# Altium PCB PCB.PcbDoc (part 1 of 2)
Units mm, origin at the board's own origin, x right, y up, seen from the top; angles counter-clockwise.
Board outline 100 x 50 mm, 4 copper layers (Top Layer, Vdd, GND, Bottom Layer), stack 0.603 mm thick; 115 components, 77 nets, 418 pads, 251 vias.
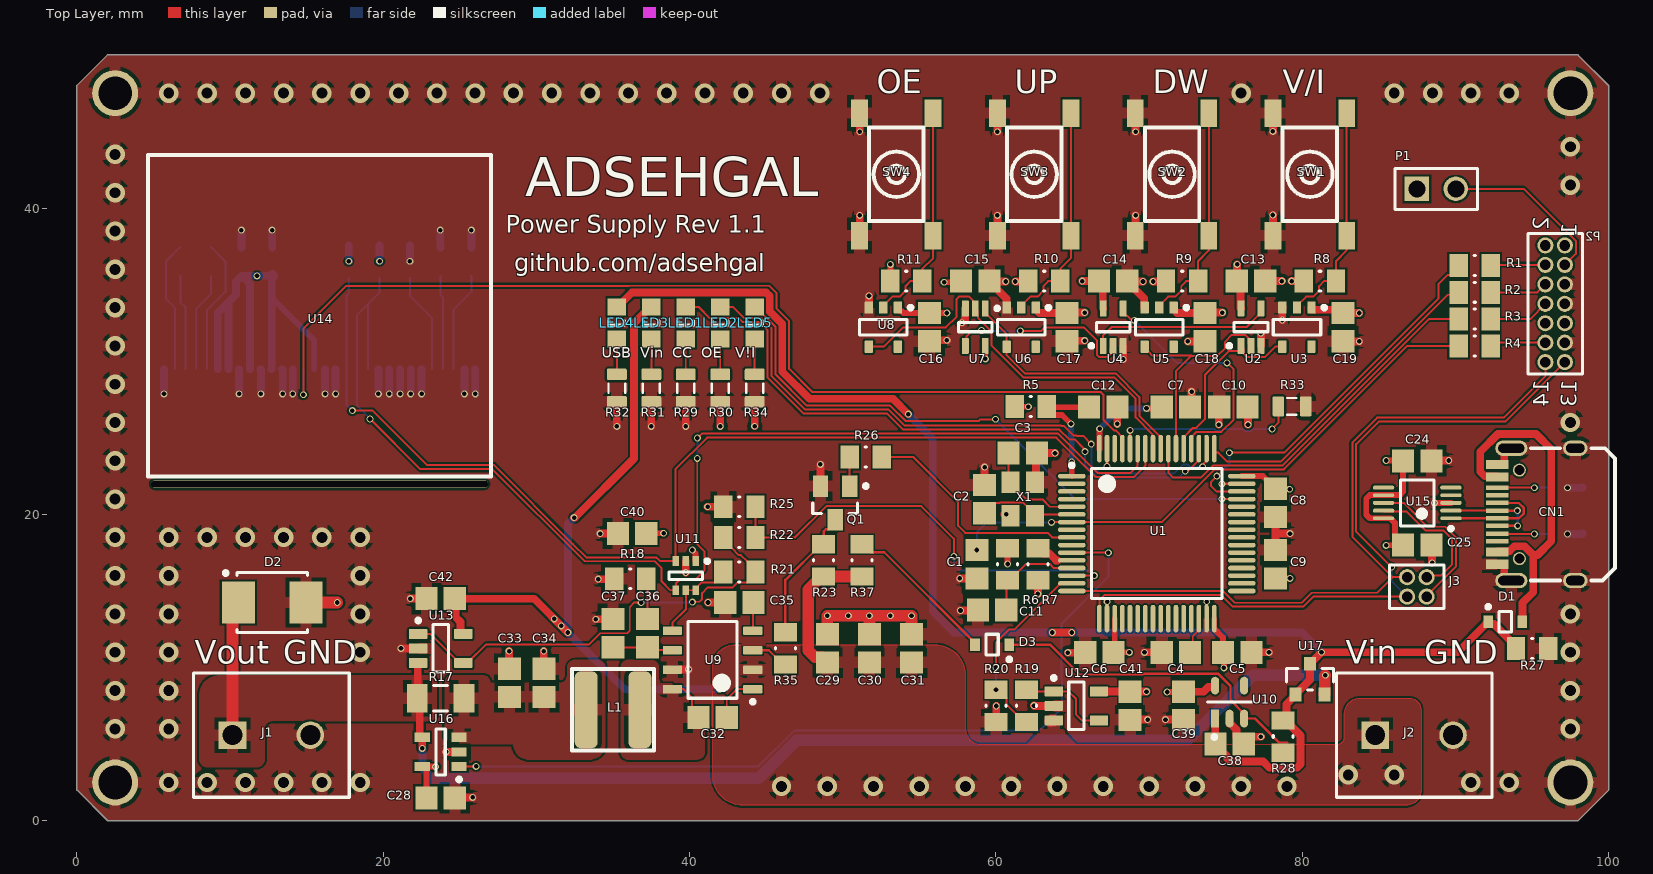
[diagram p0: Top Layer view]
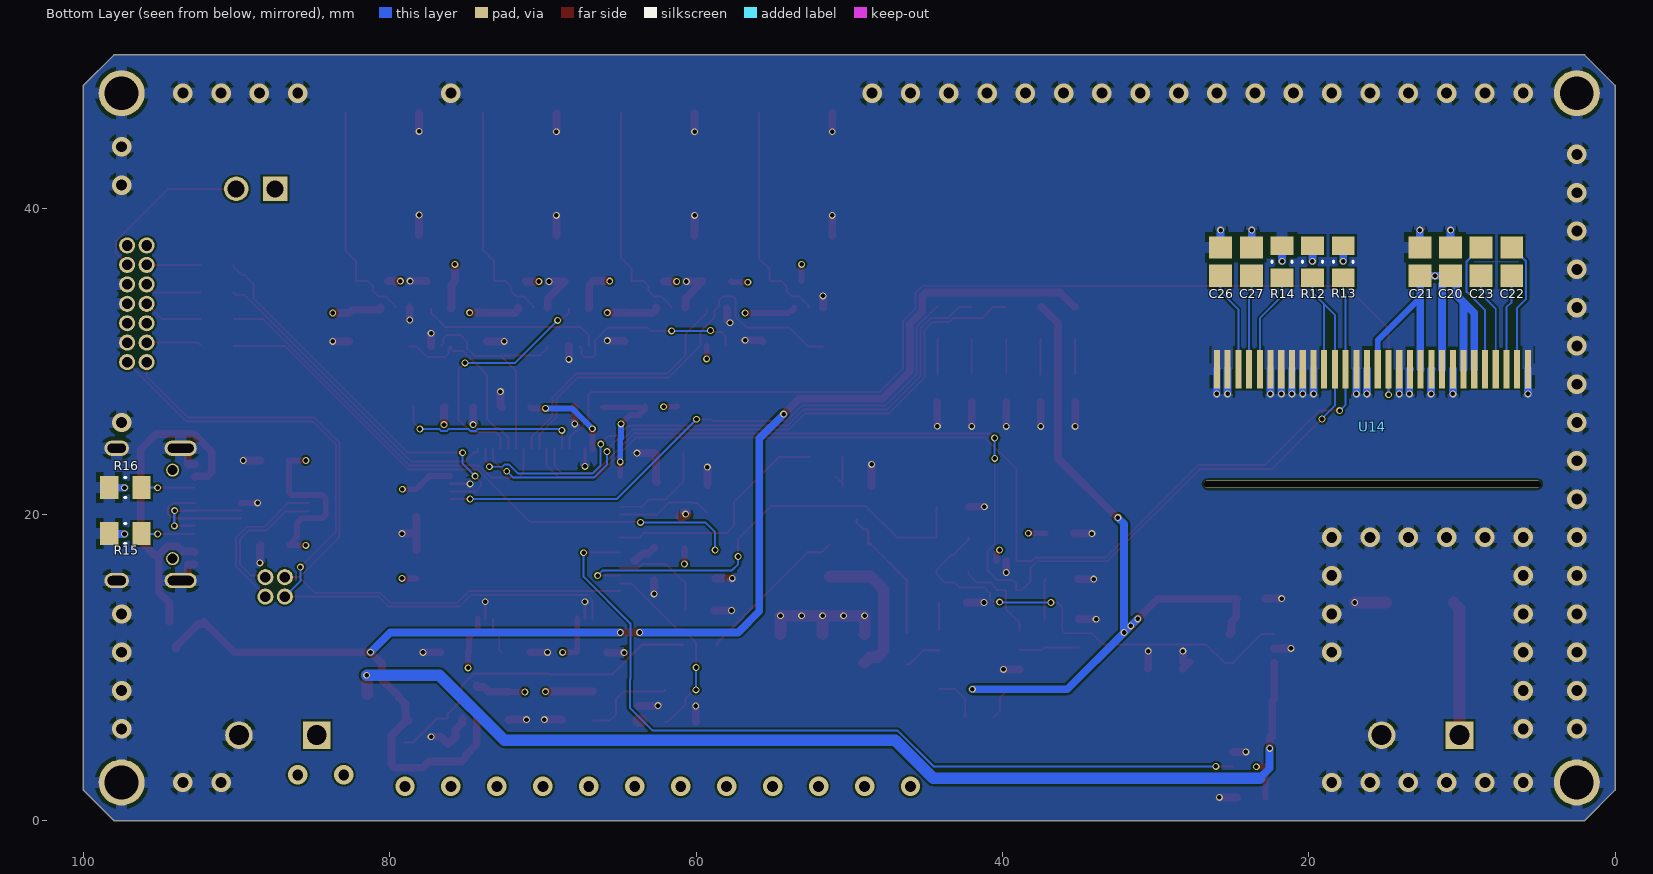
[diagram p1: Bottom Layer view, seen from below]
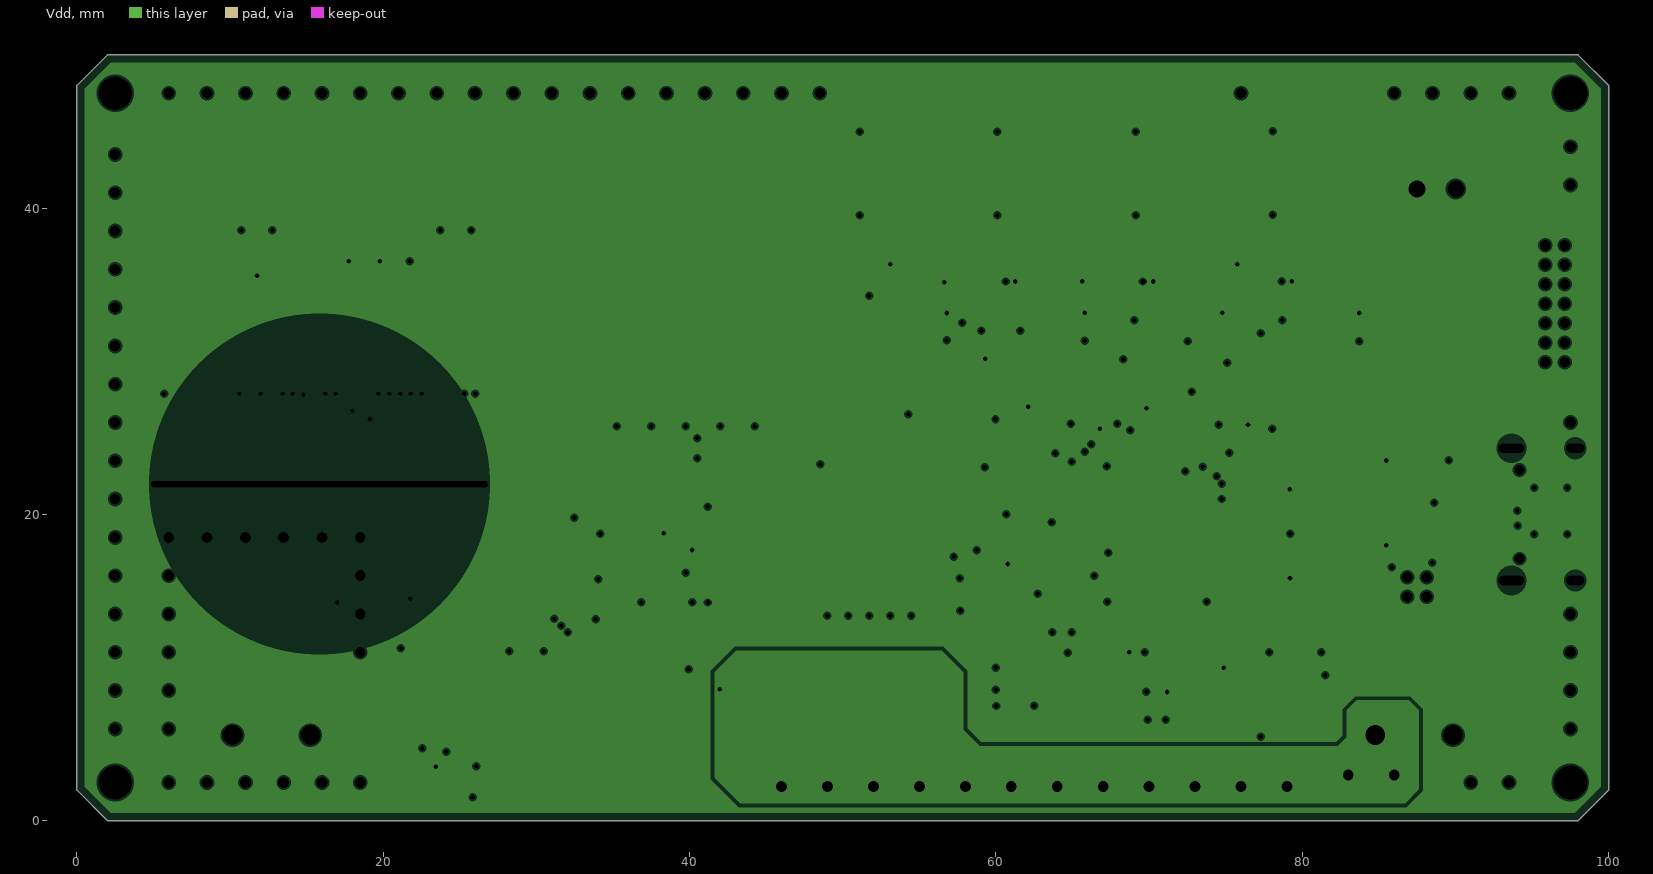
[diagram p2: Vdd, clearances drawn from the general rule]
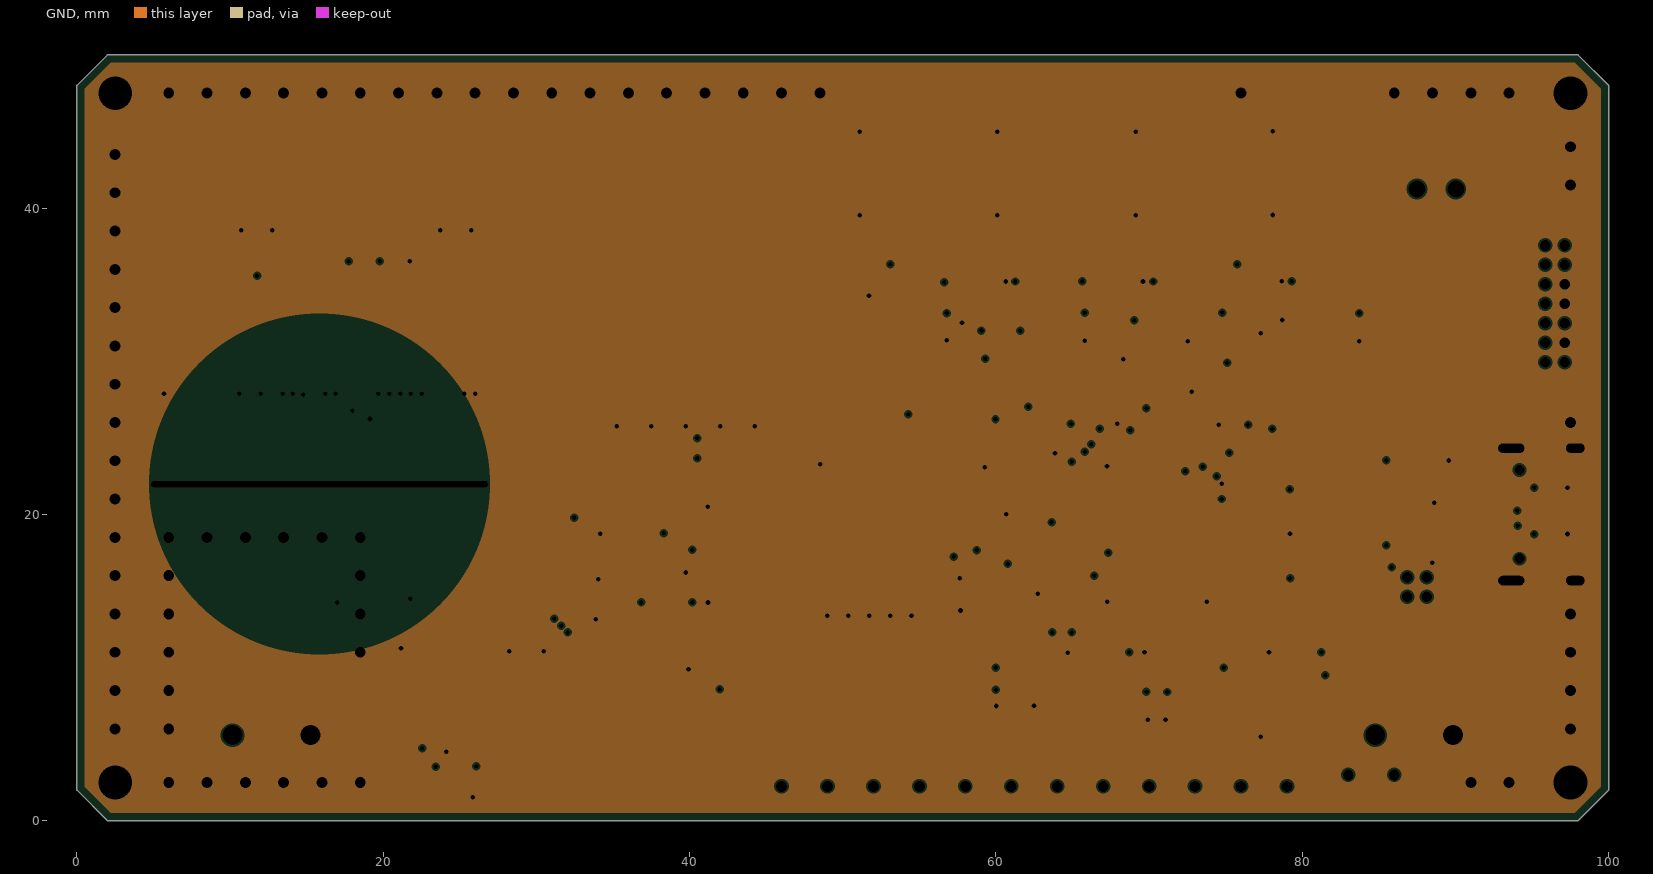
[diagram p3: GND, clearances drawn from the general rule]
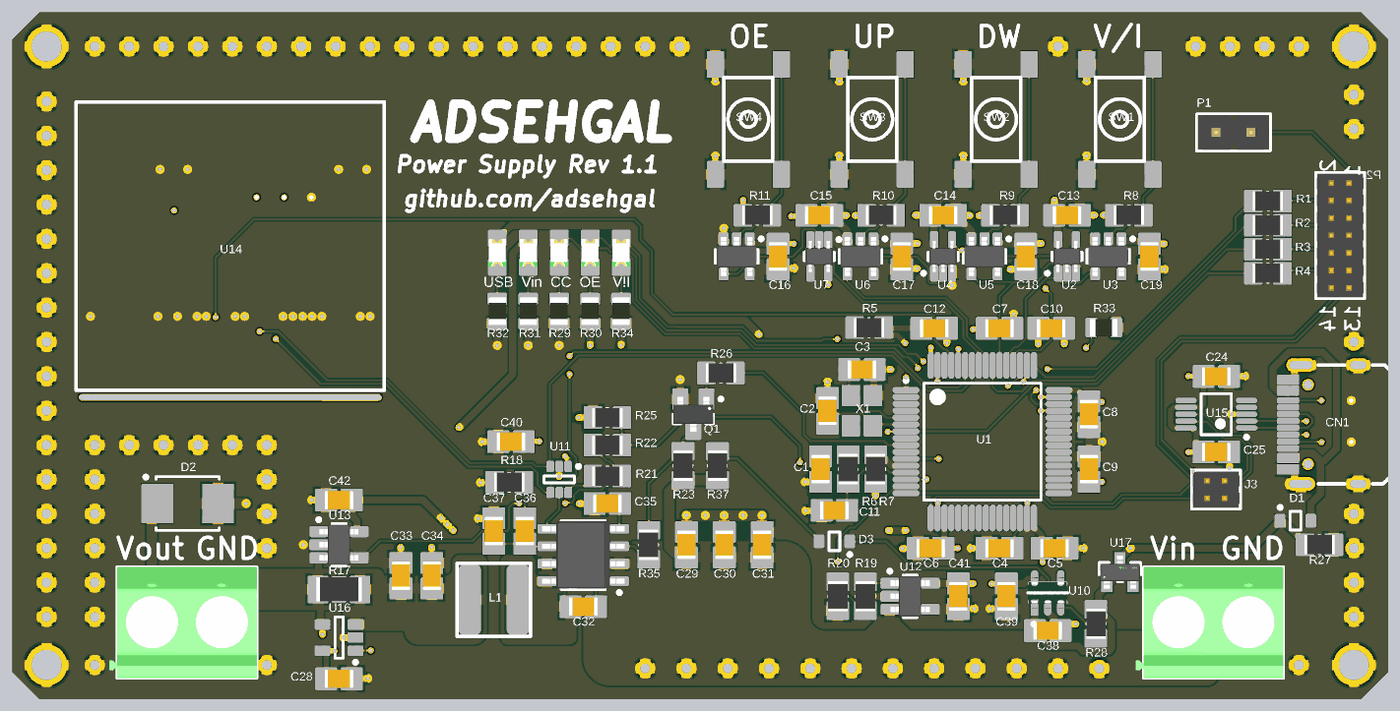
[diagram p5: 3D render of the assembled board from above, using the file's embedded part models]
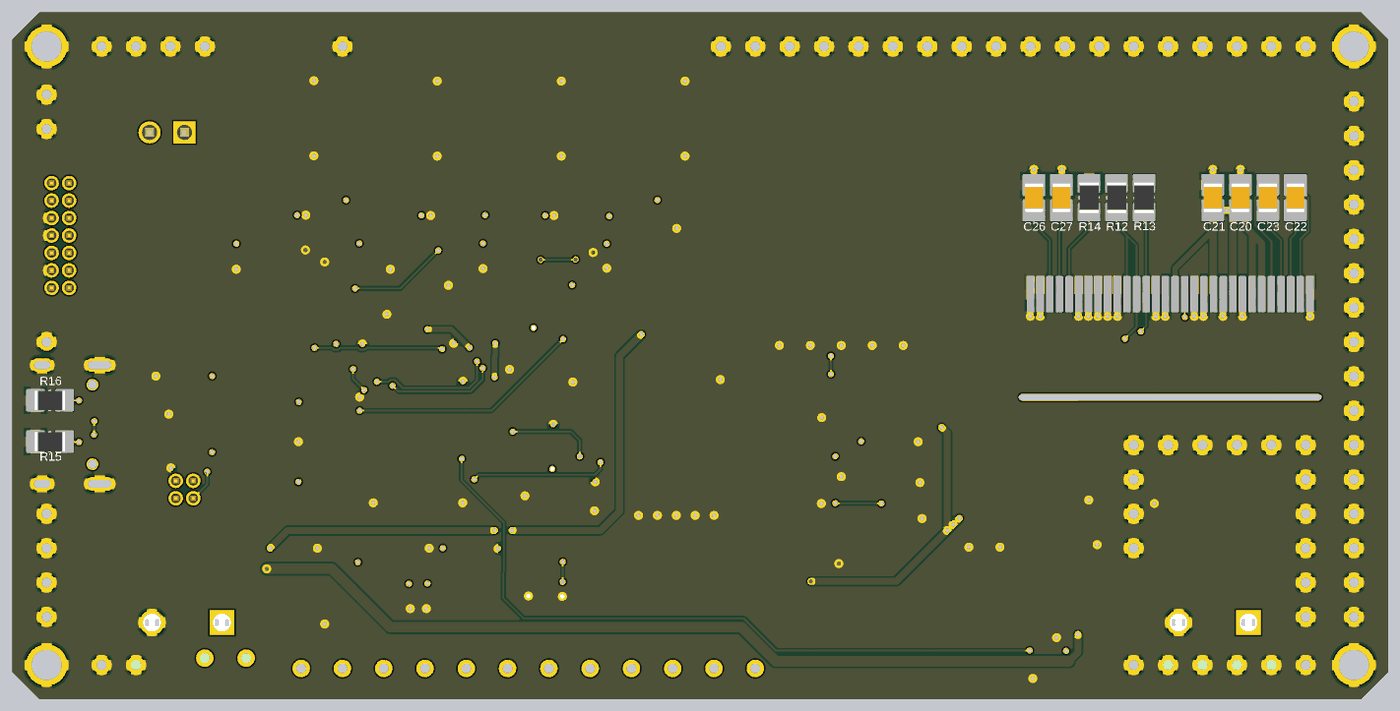
[diagram p6: 3D render of the assembled board from below, using the file's embedded part models]

## Layer stack, top to bottom
Top Solder: solder mask 0.0102, Solder Resist, Dk 3.5
Top Layer: signal copper 0.0356
Dielectric 2: prepreg 0.0711, PP-006, Dk 4.1
Vdd: plane copper 0.035, net (Multiple Nets)
Dielectric 1: dielectric 0.32, FR-4, Dk 4.8
GND: plane copper 0.035, net GND
Dielectric 3: prepreg 0.0711, PP-006, Dk 4.1
Bottom Layer: signal copper 0.0356
Bottom Solder: solder mask 0.0102, Solder Resist, Dk 3.5

## Board outline
100,2 98,0 2,0 0,2 0,48 2,50 98,50 100,48

## Design rules (kind name [scope] priority, off if disabled: settings)
Clearance [All] p1: gap=0.127 ignorepadtopadclearanceinfootprint=FALSE except(0: Arc-Hole Track-Hole SMDPad-Hole THPad-Hole Via-Hole Fill-Hole Poly-Hole Region-Hole Text-Hole)
DiffPairsRouting [All] p1: maxlimit=0.254 minlimit=0.178 mostfreqgap=0.178 toplayer_minwidth=0.127 toplayer_maxwidth=0.381 toplayer_prefwidth=0.152 bottomlayer_minwidth=0.127 bottomlayer_maxwidth=0.381 bottomlayer_prefwidth=0.152 maxuncoupledlength=12.7
MinimumSolderMaskSliver [All] p1: minsoldermaskwidth=0.127
PasteMaskExpansion [All] p1: expansion=0.076
PlaneClearance [All] p1: clearance=0.127
PlaneConnect [All] p1: planeconnectstyle=Relief reliefexpansion=0.254 reliefentries=4 reliefconductorwidth=0.254 reliefairgap=0.254
PolygonConnect [All] p1: connectstyle=Relief reliefconductorwidth=0.762 reliefentries=4 polygonreliefangle="90 Angle" airgapwidth=0.254
RoutingVias [All] p1: holewidth=0.3 width=0.45 viastyle="Through Hole" minholewidth=0.3 minwidth=0.45 maxholewidth=0.3 maxwidth=0.45
SilkToSolderMaskClearance [IsPad] p1: minsilkscreentomaskgap=0.127 clearancetoexposedcopper=TRUE
SolderMaskExpansion [All] p1: expansion=0.102 istentingtop=FALSE
Width usbPwr [(InNet('netcn1_A4/B9') OR InNet('netc38_2'))] p1: maxlimit=0.508 minlimit=0.508 preferedwidth=0.508
Width Power_3v3 [(InNet('+3v3') OR InNet('Vbat'))] p2: maxlimit=0.762 minlimit=0.178 preferedwidth=0.508
Width Power_AGND [InNet('AGND')] p3: maxlimit=0.762 minlimit=0.381 preferedwidth=0.508
Width Power_DGND [InNet('GND')] p4: maxlimit=0.762 minlimit=0.178 preferedwidth=0.508
Width Power_Vout [InNet('VCC')] p5: maxlimit=0.762 minlimit=0.381 preferedwidth=0.508
Width Power_Vin [InNet('+12')] p6: maxlimit=0.762 minlimit=0.381 preferedwidth=0.508
Width Width_5mil [All] p7: maxlimit=0.152 minlimit=0.127 preferedwidth=0.127
Width Width_0.254mm [All] p8 off: maxlimit=0.254 minlimit=0.254 preferedwidth=0.254
24 further rules are at their usual default settings.

## Classes and differential pairs
component class Designator: C13 C14 C15 C16 C17 C18 C19 C20 C21 C22 C23 C24 C25 C26 C27 CN1 D1 J3 LED1 LED2 LED3 LED4 LED5 R8 R9 R10 R11 R12 R13 R14 R15 R16 R29 R30 R31 R32 R34 SW1 SW2 SW3 SW4 U2 U3 U4 U5 U6 U7 U8 U14 U15
component class Designator: C28 C29 C30 C31 C32 C33 C34 C35 C36 C37 C38 C39 C40 C41 C42 D2 D3 J1 J2 L1 Q1 R17 R18 R19 R20 R21 R22 R23 R25 R26 R27 R28 R35 R37 U9 U10 U11 U12 U13 U16 U17
component class Designator: C1 C2 C3 C4 C5 C6 C7 C8 C9 C10 C11 C12 P1 P2 R1 R2 R3 R4 R5 R6 R7 R33 U1 X1
differential pair D: +D_P -D_N

## Components (designator, comment, footprint, x,y, rotation, side; value= is the part's Value field where it differs from the comment)
C1 "Capacitor 100 nF +/-10% 50 V 0805" CAPC2013X95X50ML10T25 58.75,16.75 r270 top value=100nF
C2 "Capacitor 100 nF +/-10% 50 V 0805" CAPC2013X95X50ML10T25 59.25,21 r270 top value=22pF
C3 "Capacitor 100 nF +/-10% 50 V 0805" CAPC2013X95X50ML10T25 61.75,24 r180 top value=22pF
C4 "Capacitor 100 nF +/-10% 50 V 0805" CAPC2013X95X50ML10T25 71.75,11 r180 top value=100nF
C5 "Capacitor 100 nF +/-10% 50 V 0805" CAPC2013X95X50ML10T25 75.75,11 r180 top value=100nF
C6 "Capacitor 100 nF +/-10% 50 V 0805" CAPC2013X95X50ML10T25 66.75,11 r0 top value=100nF
C7 "Capacitor 100 nF +/-10% 50 V 0805" CAPC2013X95X50ML10T25 71.75,27 r180 top value=100nF
C8 "Capacitor 100 nF +/-10% 50 V 0805" CAPC2013X95X50ML10T25 78.25,20.75 r90 top value=100nF
C9 "Capacitor 100 nF +/-10% 50 V 0805" CAPC2013X95X50ML10T25 78.25,16.75 r270 top value=100nF
C10 "Capacitor 100 nF +/-10% 50 V 0805" CAPC2013X95X50ML10T25 75.5,27 r0 top value=100nF
C11 "Capacitor 100 nF +/-10% 50 V 0805" CAPC2013X95X50ML10T25 59.75,13.75 r0 top value=100nF
C12 "Capacitor 100 nF +/-10% 50 V 0805" CAPC2013X95X50ML10T25 67,27 r180 top value=100nF
C13 "Capacitor 100 nF +/-10% 50 V 0805" CAPC2013X95X50ML10T25 76.65,35.225 r0 top value=100nF
C14 "Capacitor 100 nF +/-10% 50 V 0805" CAPC2013X95X50ML10T25 67.65,35.225 r0 top value=100nF
C15 "Capacitor 100 nF +/-10% 50 V 0805" CAPC2013X95X50ML10T25 58.65,35.225 r0 top value=100nF
C16 "Capacitor 100 nF +/-10% 50 V 0805" CAPC2013X95X50ML10T25 55.65,32.225 r270 top value=100nF
C17 "Capacitor 100 nF +/-10% 50 V 0805" CAPC2013X95X50ML10T25 64.65,32.225 r270 top value=100nF
C18 "Capacitor 100 nF +/-10% 50 V 0805" CAPC2013X95X50ML10T25 73.65,32.225 r270 top value=100nF
C19 "Capacitor 100 nF +/-10% 50 V 0805" CAPC2013X95X50ML10T25 82.65,32.225 r270 top value=100nF
C20 "Capacitor 100 nF +/-10% 50 V 0805" CAPC2013X95X50ML10T25 10.75,36.5 r90 bottom value=1uF
C21 "Capacitor 100 nF +/-10% 50 V 0805" CAPC2013X95X50ML10T25 12.75,36.5 r270 bottom value=1uF
C22 "Capacitor 100 nF +/-10% 50 V 0805" CAPC2013X95X50ML10T25 6.75,36.5 r270 bottom value=1uF
C23 "Capacitor 100 nF +/-10% 50 V 0805" CAPC2013X95X50ML10T25 8.75,36.5 r90 bottom value=1uF
C24 "Capacitor 100 nF +/-10% 50 V 0805" CAPC2013X95X50ML10T25 87.5,23.5 r0 top value=100nF
C25 "Capacitor 100 nF +/-10% 50 V 0805" CAPC2013X95X50ML10T25 87.5,18 r0 top value=100nF
C26 "Capacitor 100 nF +/-10% 50 V 0805" CAPC2013X95X50ML10T25 25.75,36.5 r270 bottom value=2.2uF
C27 "Capacitor 100 nF +/-10% 50 V 0805" CAPC2013X95X50ML10T25 23.75,36.5 r270 bottom value=4.7uF
C28 "Capacitor 100 nF +/-10% 50 V 0805" CAPC2013X95X50ML10T25 23.75,1.5 r0 top value=100nF
C29 "Capacitor 100 nF +/-10% 50 V 0805" CAPC2013X95X50ML10T25 49,11.25 r90 top value=100nF
C30 "Capacitor 100 nF +/-10% 50 V 0805" CAPC2013X95X50ML10T25 51.75,11.25 r90 top value=100nF
C31 "Capacitor 100 nF +/-10% 50 V 0805" CAPC2013X95X50ML10T25 54.5,11.25 r90 top value=100nF
C32 "Capacitor 100 nF +/-10% 50 V 0805" CAPC2013X95X50ML10T25 41.5,6.75 r180 top value=100nF
C33 "Capacitor 100 nF +/-10% 50 V 0805" CAPC2013X95X50ML10T25 28.25,9 r270 top value=100nF
C34 "Capacitor 100 nF +/-10% 50 V 0805" CAPC2013X95X50ML10T25 30.5,9 r270 top value=1uF
C35 "Capacitor 100 nF +/-10% 50 V 0805" CAPC2013X95X50ML10T25 43.25,14.25 r180 top value=10nF
C36 "Capacitor 100 nF +/-10% 50 V 0805" CAPC2013X95X50ML10T25 37.25,12.25 r90 top value=1nF
C37 "Capacitor 100 nF +/-10% 50 V 0805" CAPC2013X95X50ML10T25 35,12.25 r90 top value=47pF
C38 "Capacitor 100 nF +/-10% 50 V 0805" CAPC2013X95X50ML10T25 75.25,5 r180 top value=100nF
C39 "Capacitor 100 nF +/-10% 50 V 0805" CAPC2013X95X50ML10T25 72.25,7.5 r90 top value=100nF
C40 "Capacitor 100 nF +/-10% 50 V 0805" CAPC2013X95X50ML10T25 36.25,18.75 r180 top value=100nF
C41 "Capacitor 100 nF +/-10% 50 V 0805" CAPC2013X95X50ML10T25 68.75,7.5 r270 top value=100nF
C42 "Capacitor 100 nF +/-10% 50 V 0805" CAPC2013X95X50ML10T25 23.75,14.5 r180 top value=100nF
CN1 "USB C 16 Pin SMD" "USB C 16 Pin SMD-Footprint-1" 92,20 r90 top locked
D1 "BAT54HT1G" ONSC-SOD-323-2-477-02_V 93.25,13 r0 top
D2 "MBRS230LT3G" ONSC-SMB-2-403A-03_D_V 12.75,14.25 r0 top
D3 "BAT54HT1G" ONSC-SOD-323-2-477-02_V 59.75,11.5 r180 top
J1 "1729128" PHOE-1729128-2_V 12.7,5.588 r0 top locked
J2 "1729128" PHOE-1729128-2_V 87.3,5.588 r0 top locked
J3 "62200421121" 62200421121 87.478,15.265 r270 top
L1 "LQH5BPN4R7NT0L" LQH5BPN4R7NT0L-Footprint-1 35,7.25 r180 top
LED1 "CC_LED" 0805_A 39.75,32.5 r90 top
LED2 "OE_LED" 0805_A 42,32.5 r90 top
LED3 "PWR_LED" 0805_A 37.5,32.5 r90 top
LED4 "USB_LED" 0805_A 35.25,32.5 r90 top
LED5 "PWR_LED" 0805_A 44.25,32.5 r90 top
P1 "61300211121" 61300211121 88.75,41.25 r0 top
P2 "62201421121" 62201421121 96.5,33.75 r270 top
Q1 "FDN335N" FAIR-SSOT3L-3_V 49.5,20.75 r270 top
R1 "Resistor 0R +/- 1% 0805 125 mW" RESC2013X50X35ML15T15 91.25,36.25 r180 top value=22
R2 "Resistor 0R +/- 1% 0805 125 mW" RESC2013X50X35ML15T15 91.25,34.5 r180 top value=22
R3 "Resistor 0R +/- 1% 0805 125 mW" RESC2013X50X35ML15T15 91.25,32.75 r180 top value=22
R4 "Resistor 0R +/- 1% 0805 125 mW" RESC2013X50X35ML15T15 91.25,31 r180 top value=22
R5 "Resistor 0R +/- 1% 0805 125 mW" RESC2013X50X35ML15T15 62.273,27.051 r0 top value=0
R6 "Resistor 0R +/- 1% 0805 125 mW" RESC2013X50X35ML15T15 60.75,16.75 r270 top value=0
R7 "Resistor 0R +/- 1% 0805 125 mW" RESC2013X50X35ML15T15 62.75,16.75 r270 top value=0
R8 "Resistor 0R +/- 1% 0805 125 mW" RESC2013X50X35ML15T15 81.15,35.225 r180 top value=1K
R9 "Resistor 0R +/- 1% 0805 125 mW" RESC2013X50X35ML15T15 72.15,35.225 r180 top value=1K
R10 "Resistor 0R +/- 1% 0805 125 mW" RESC2013X50X35ML15T15 63.15,35.225 r180 top value=1K
R11 "Resistor 0R +/- 1% 0805 125 mW" RESC2013X50X35ML15T15 54.15,35.225 r180 top value=1K
R12 "Resistor 0R +/- 1% 0805 125 mW" RESC2013X50X35ML15T15 19.75,36.5 r90 bottom value=4.7K
R13 "Resistor 0R +/- 1% 0805 125 mW" RESC2013X50X35ML15T15 17.75,36.5 r90 bottom value=4.7K
R14 "Resistor 0R +/- 1% 0805 125 mW" RESC2013X50X35ML15T15 21.75,36.5 r90 bottom value=390K
R15 "Resistor 0R +/- 1% 0805 125 mW" RESC2013X50X35ML15T15 97.25,18.75 r0 bottom value=5.1K
R16 "Resistor 0R +/- 1% 0805 125 mW" RESC2013X50X35ML15T15 97.25,21.75 r0 bottom value=5.1K
R17 "Resistor 0R +/- 5% 1206 250 mW" RESC3216X60X45ML15T20 23.75,8 r0 top value=0.01R
R18 "Resistor 0R +/- 1% 0805 125 mW" RESC2013X50X35ML15T15 36.125,15.8 r180 top value=29.4k
R19 "Resistor 0R +/- 1% 0805 125 mW" RESC2013X50X35ML15T15 62,7.5 r270 top value=29k
R20 "Resistor 0R +/- 1% 0805 125 mW" RESC2013X50X35ML15T15 60,7.5 r90 top value=10k
R21 "Resistor 0R +/- 1% 0805 125 mW" RESC2013X50X35ML15T15 43.25,16.25 r180 top value=5k
R22 "Resistor 0R +/- 1% 0805 125 mW" RESC2013X50X35ML15T15 43.25,18.5 r0 top value=26k
R23 "Resistor 0R +/- 1% 0805 125 mW" RESC2013X50X35ML15T15 48.75,17 r270 top value=10k
R25 "Resistor 0R +/- 1% 0805 125 mW" RESC2013X50X35ML15T15 43.25,20.5 r0 top value=10k
R26 "Resistor 0R +/- 1% 0805 125 mW" RESC2013X50X35ML15T15 51.5,23.75 r180 top value=1k
R27 "Resistor 10k +/-1% 0805 125 mW" RESC2013X50X35ML15T15 95,11.25 r180 top value=10k
R28 "Resistor 10k +/-1% 0805 125 mW" RESC2013X50X35ML15T15 78.75,5.5 r270 top value=1k
R29 "Resistor 470R +/-5% 0805 125 mW" RESC0805(2012)_L 39.75,28.25 r90 top value=1K
R30 "Resistor 470R +/-5% 0805 125 mW" RESC0805(2012)_L 42,28.25 r90 top value=1K
R31 "Resistor 470R +/-5% 0805 125 mW" RESC0805(2012)_L 37.5,28.25 r90 top value=5K
R32 "Resistor 470R +/-5% 0805 125 mW" RESC0805(2012)_L 35.25,28.25 r90 top value=2K
R33 "Resistor 470R +/-5% 0805 125 mW" RESC0805(2012)_L 79.324,27.051 r180 top value=10k
R34 "Resistor 470R +/-5% 0805 125 mW" RESC0805(2012)_L 44.25,28.25 r90 top value=1k
R35 "Resistor 10k +/-1% 0805 125 mW" RESC2013X50X35ML15T15 46.25,11.25 r270 top value=1k
R37 "Resistor 10k +/-1% 0805 125 mW" RESC2013X50X35ML15T15 51.25,17 r90 top value=1k
SW1 "K2-1187SQ-A4SW" K2-1187SQ-A4SW-Footprint-1 80.495,42.201 r90 top
SW2 "K2-1187SQ-A4SW" K2-1187SQ-A4SW-Footprint-1 71.495,42.201 r90 top
SW3 "K2-1187SQ-A4SW" K2-1187SQ-A4SW-Footprint-1 62.495,42.201 r90 top
SW4 "K2-1187SQ-A4SW" K2-1187SQ-A4SW-Footprint-1 53.495,42.201 r90 top
U1 "STM32F401RBT6" STM-LQFP64_N 70.5,18.75 r0 top locked
U2 "SN74LVC1G08DCKR" DCK0005A_M 76.65,32.225 r90 top
U3 "SN74LVC1G17DBVR" DBV0005A_L 79.65,32.225 r270 top
U4 "SN74LVC1G08DCKR" DCK0005A_M 67.65,32.225 r90 top
U5 "SN74LVC1G17DBVR" DBV0005A_L 70.65,32.225 r270 top
U6 "SN74LVC1G17DBVR" DBV0005A_L 61.65,32.225 r270 top
U7 "SN74LVC1G08DCKR" DCK0005A_M 58.65,32.225 r270 top
U8 "SN74LVC1G17DBVR" DBV0005A_L 52.65,32.225 r270 top
U9 "TPS54331DR" D0008A_L 41.5,10.5 r180 top
U10 "MIC5205-3.3YM5-TR" FP-M5-IPC_C 75.25,7.75 r90 top
U11 "MCP4018T-502E/LT" SC70-LT6_L 39.75,16 r270 top
U12 "TLV2711CDBVR" DBV0005A_M 65.25,7.5 r0 top
U13 "TLV2711CDBVR" DBV0005A_M 23.75,11.25 r0 top
U14 "SSD1306_0.96in" SSD1306_0.96in-Footprint-1 15.845,32.976 r0 top locked
U15 "CH340E" TSSOP50P490X110-10N 87.5,20.75 r180 top
U16 "INA180A3" SOT95P245X110-5N 23.75,4.5 r180 top
U17 "NTR4101PT1G" FP-318-08-MFG 80.5,9.25 r90 top
X1 "Crystal_3225_1_3" Crystal_3225_1_3-Footprint-1 61.75,21 r270 top

## Footprints (in the part's own frame and the unit in brackets; to place one, negate y for a bottom-side part, rotate by r counter-clockwise, add the part's x,y. Pads: shape width x height; smd on the part's side, far side on the other; paste and mask are expansions set on the pad)
0805_A [mm] "Chip LED, 2-Leads, Body 2.0x1.3mm, IPC Medium Density"
  rect 1.1x1.2 smd: 1(-1.05,0) 2(1.05,0)
  silkscreen extent -0.15,-0.5 0.15,0.5, body extent -1,-0.62 1,0.63, height 0.68
61300211121 [mm] "Pin Header, pitch 2.54 mm, THT, Vertical, single row, 2p"
  rect 1.6x1.6 hole 1.1: 1(-1.27,0)
  round 1.6 hole 1.1: 2(1.27,0)
  silkscreen extent -2.69,-1.35 2.69,1.35, body extent -2.54,-1.27 2.54,1.27, height 8.57
62200421121 [mm] "Pin Header, pitch 1.27 mm, THT, Vertical, dual row, 4p"
  round 1.05 hole 0.7: 1(-0.635,-0.635) 2(-0.635,0.635) 3(0.635,-0.635) 4(0.635,0.635)
  silkscreen extent -1.42,-1.78 1.42,1.78, body extent -1.27,-1.7 1.27,1.7, height 5.33
62201421121 [mm] "Pin Header, pitch 1.27 mm, THT, Vertical, dual row, 14p"
  round 1.05 hole 0.7: 1(-3.81,0.635) 2(-3.81,-0.635) 3(-2.54,0.635) 4(-2.54,-0.635) 5(-1.27,0.635) 6(-1.27,-0.635) 7(0,0.635) 8(0,-0.635) 9(1.27,0.635) 10(1.27,-0.635) 11(2.54,0.635) 12(2.54,-0.635) 13(3.81,0.635) 14(3.81,-0.635)
  silkscreen extent -4.59,-1.78 4.59,1.78, body extent -4.44,-1.7 4.45,1.7, height 5.33
CAPC2013X95X50ML10T25 [mm] "Chip Capacitor, 2-Leads, Body 2.10x1.35mm, IPC Low Density"
  rect 1.45x1.5 smd: 1(-0.925,0) 2(0.925,0)
  body extent -1.05,-0.67 1.05,0.67, height 0.95
Crystal_3225_1_3-Footprint-1 [mm]
  rect 1.4x1.2 smd: 1(-1.1,-0.8) 2(1.1,-0.8) 3(1.1,0.8) 4(-1.1,0.8)
  body extent -1.52,-1.27 1.52,1.27, height 0.7
D0008A_L [mm] "SOIC, 8-Leads, Body 5x4mm, Pitch 1.27mm, IPC High Density"
  rrect18% 1.25x0.55 smd: 1(-2.625,1.905) 2(-2.625,0.635) 3(-2.625,-0.635) 4(-2.625,-1.905) 5(2.625,-1.905) 6(2.625,-0.635) 7(2.625,0.635) 8(2.625,1.905)
  silkscreen extent -2.75,-2.5 1.6,2.85, body extent -3,-2.45 3,2.45, height 1.63
DBV0005A_L [mm] "SOT23, 5-Leads, Body 3.05x1.75mm, Pitch 0.95mm, IPC High Density"
  rrect18% 0.8x0.55 smd: 1(-1.275,0.95) 2(-1.275,0) 3(-1.275,-0.95) 4(1.275,-0.95) 5(1.275,0.95)
  silkscreen extent -1.4,-1.55 0.5,1.9, body extent -1.42,-1.46 1.42,1.46, height 1.08
DBV0005A_M [mm] "SOT23, 5-Leads, Body 3.05x1.75mm, Pitch 0.95mm, IPC Low Density"
  rrect15% 1.2x0.65 smd: 1(-1.475,0.95) 2(-1.475,0) 3(-1.475,-0.95) 4(1.475,-0.95) 5(1.475,0.95)
  silkscreen extent -1.6,-1.55 0.5,1.95, body extent -1.42,-1.46 1.42,1.46, height 1.08
DCK0005A_M [mm] "SOT23, 5-Leads, Body 2.15x1.4mm, Pitch 0.65mm, IPC Low Density"
  rrect22% 1.05x0.45 smd: 1(-1.225,0.65) 2(-1.225,0) 3(-1.225,-0.65) 4(1.225,-0.65) 5(1.225,0.65)
  silkscreen extent -1.35,-1.1 0.3,1.55, body extent -1.14,-1 1.14,1, height 0.94
FAIR-SSOT3L-3_V [mm] "SOT23, 3-Leads, Body 2.92x1.4mm, Pitch 0.95mm"
  rect 1.4x1 smd: 1(-1.1,0.95) 2(-1.1,-0.95) 3(1.1,0)
  silkscreen extent -1.22,-1.46 0.7,2.13, body extent -1.26,-1.46 1.26,1.46, height 1.12
FP-318-08-MFG [mm]
  rect 0.9x0.8 smd paste+0 mask+0: 1(-1,0.95) 2(-1,-0.95) 3(1,0)
  silkscreen extent -0.7,-1.52 0.7,1.52, body extent -1.55,-1.62 1.55,1.62, height 0.25
FP-M5-IPC_C [mm]
  rect 1.156x0.53 smd paste+0 mask+0: 1(-1.075,0.95)
  rrect100% 1.156x0.53 smd paste+0 mask+0: 2(-1.075,0) 3(-1.075,-0.95) 4(1.075,-0.95) 5(1.075,0.95)
  silkscreen extent -2.4,-1.45 0,1.45, body extent -1.75,-1.55 1.75,1.55, height 0.25
K2-1187SQ-A4SW-Footprint-1 [mm]
  rect 1.8x1.1 smd: 1(-4,2.4) 2(-4,-2.4) 3(4,2.4) 4(4,-2.4)
  silkscreen extent -3.05,-1.78 3.05,1.78
LQH5BPN4R7NT0L-Footprint-1 [mm]
  rrect50% 1.5x5 smd: 1(-1.75,0) 2(1.75,0)
  silkscreen extent -2.67,-2.67 2.67,2.67, body extent -2.67,-2.67 2.67,2.67, height 2.2
ONSC-SMB-2-403A-03_D_V [mm] "Molded, 2-Leads, Body 4.57x3.81mm"
  rect 2.159x2.743 smd: 1(-2.21,0) 2(2.21,0)
  silkscreen extent -3.16,-1.95 2.3,2.05, body extent -2.29,-1.91 2.28,1.91, height 2.41
ONSC-SOD-323-2-477-02_V [mm] "SOD, 2-Leads, Body 1.7x1.25mm"
  rect 0.63x0.83 smd: 1(-1.115,0) 2(1.115,0)
  silkscreen extent -1.24,-0.67 0.4,1.09, body extent -0.85,-0.63 0.85,0.63, height 1.06
PHOE-1729128-2_V [mm] "Receptacle, 2-Leads, Body 8.1x10.16mm, Pitch 5.08mm"
  rect 1.8x1.8 hole 1.3: 1(-2.54,0)
  round 1.8 hole 1.3: 2(2.54,0)
  silkscreen extent -5.08,-4.05 5.08,4.05, body extent -5.65,-4.05 5.08,4.05, height 10.01
RESC0805(2012)_L [mm] "Chip Resistor, Body 2.0x1.3mm, IPC High Density"
  rrect25% 0.76x1.3 smd: 1(-0.9,0) 2(0.89,0)
  silkscreen extent -0.3,-0.55 0.3,0.55, body extent -1,-0.62 1,0.63, height 0.6
RESC2013X50X35ML15T15 [mm] "Chip Resistor, 2-Leads, Body 2.2x1.4mm, IPC Low Density"
  rect 1.2x1.5 smd: 1(-1.05,0) 2(1.05,0)
  silkscreen extent -0.05,-0.65 0.05,0.65, body extent -1.1,-0.7 1.1,0.7, height 0.5
RESC3216X60X45ML15T20 [mm] "Chip Resistor, 2-Leads, Body 3.3x1.75mm, IPC Low Density"
  rect 1.35x1.85 smd: 1(-1.525,0) 2(1.525,0)
  silkscreen extent -0.45,-0.82 0.45,0.82, body extent -1.65,-0.87 1.65,0.87, height 0.6
SC70-LT6_L [mm] "SOT363, 6-Leads, Body 2x1.3mm, Pitch 0.65mm, Lead Span 2.1mm, IPC High Density"
  rect 0.65x0.4 smd: 1(-0.95,0.65) 2(-0.95,0) 3(-0.95,-0.65) 4(0.95,-0.65) 5(0.95,0) 6(0.95,0.65)
  silkscreen extent -1.07,-1.1 0.25,1.53, body extent -0.7,-1.1 0.7,1.1, height 1.1
SOT95P245X110-5N [mm] "SOT23, 5-Leads, Body 2.90x2.45mm, Pitch 0.95mm, IPC Medium Density"
  rect 1x0.6 smd: 1(-1.2,0.95) 2(-1.2,0) 3(-1.2,-0.95) 4(1.2,-0.95) 5(1.2,0.95)
  silkscreen extent -1.33,-1.5 0.3,1.92, body extent -0.7,-1.5 0.7,1.5, height 1.1
SSD1306_0.96in-Footprint-1 [mm]
  rect 0.4x2.5 smd far side: 1(-10.15,-3.5) 2(-9.45,-3.5) 3(-8.75,-3.5) 4(-8.05,-3.5) 5(-7.35,-3.5) 6(-6.65,-3.5) 7(-5.95,-3.5) 8(-5.25,-3.5) 9(-4.55,-3.5) 10(-3.85,-3.5) 11(-3.15,-3.5) 12(-2.45,-3.5) 13(-1.75,-3.5) 14(-1.05,-3.5) 15(-0.35,-3.5) 16(0.35,-3.5) 17(1.05,-3.5) 18(1.75,-3.5) 19(2.45,-3.5) 20(3.15,-3.5) 21(3.85,-3.5) 22(4.55,-3.5) 23(5.25,-3.5) 24(5.95,-3.5) 25(6.65,-3.5) 26(7.35,-3.5) 27(8.05,-3.5) 28(8.75,-3.5) 29(9.45,-3.5) 30(10.15,-3.5)
  oval 22x0.5 hole 0.4 slot 22 at 0 deg: 31(0,-11)
  silkscreen extent -11.2,-10.49 11.2,10.49
STM-LQFP64_N [mm] "Thin QFP, 64-Leads, Body 10x10mm, Pitch 0.5mm, IPC Medium Density"
  oval 1.8x0.3 smd: 1(-5.55,3.75) 2(-5.55,3.25) 3(-5.55,2.75) 4(-5.55,2.25) 5(-5.55,1.75) 6(-5.55,1.25) 7(-5.55,0.75) 8(-5.55,0.25) 9(-5.55,-0.25) 10(-5.55,-0.75) 11(-5.55,-1.25) 12(-5.55,-1.75) 13(-5.55,-2.25) 14(-5.55,-2.75) 15(-5.55,-3.25) 16(-5.55,-3.75) 33(5.55,-3.75) 34(5.55,-3.25) 35(5.55,-2.75) 36(5.55,-2.25) 37(5.55,-1.75) 38(5.55,-1.25) 39(5.55,-0.75) 40(5.55,-0.25) 41(5.55,0.25) 42(5.55,0.75) 43(5.55,1.25) 44(5.55,1.75) 45(5.55,2.25) 46(5.55,2.75) 47(5.55,3.25) 48(5.55,3.75)
  oval 0.3x1.8 smd: 17(-3.75,-5.55) 18(-3.25,-5.55) 19(-2.75,-5.55) 20(-2.25,-5.55) 21(-1.75,-5.55) 22(-1.25,-5.55) 23(-0.75,-5.55) 24(-0.25,-5.55) 25(0.25,-5.55) 26(0.75,-5.55) 27(1.25,-5.55) 28(1.75,-5.55) 29(2.25,-5.55) 30(2.75,-5.55) 31(3.25,-5.55) 32(3.75,-5.55) 49(3.75,5.55) 50(3.25,5.55) 51(2.75,5.55) 52(2.25,5.55) 53(1.75,5.55) 54(1.25,5.55) 55(0.75,5.55) 56(0.25,5.55) 57(-0.25,5.55) 58(-0.75,5.55) 59(-1.25,5.55) 60(-1.75,5.55) 61(-2.25,5.55) 62(-2.75,5.55) 63(-3.25,5.55) 64(-3.75,5.55)
  silkscreen extent -5.67,-4.25 4.25,4.57, body extent -5,-5 5,5, height 1.6
TSSOP50P490X110-10N [mm] "TSSOP, 10-Leads, Body 2.98x2.98mm, Pitch 0.50mm, IPC Medium Density"
  oval 1.4x0.25 smd: 1(-2.2,1) 2(-2.2,0.5) 3(-2.2,0) 4(-2.2,-0.5) 5(-2.2,-1) 6(2.2,-1) 7(2.2,-0.5) 8(2.2,0) 9(2.2,0.5) 10(2.2,1)
  silkscreen extent -2.33,-1.5 1.1,1.8, body extent -1.5,-1.5 1.5,1.5, height 1.1
"USB C 16 Pin SMD-Footprint-1" [mm]
  rect 0.6x1.45 smd: A1/B12(-3.25,-0.725) A4/B9(-2.45,-0.725) B1/A12(3.25,-0.725) B4/A9(2.45,-0.725)
  rect 0.3x1.45 smd: A5(-1.25,-0.725) A6(-0.25,-0.725) A7(0.25,-0.725) A8(1.25,-0.725) B5(1.75,-0.725) B6(0.75,-0.725) B7(-0.75,-0.725) B8(-1.75,-0.725)
  round 0.85 hole 0.65 unplated: H1(-2.89,-2.17) H2(2.89,-2.17)
  oval 1x2.1 hole 0.6 slot 1.7 at 90 deg: S1(4.32,-1.64) S2(-4.32,-1.64)
  oval 1x1.6 hole 0.6 slot 1.2 at 90 deg: S3(4.32,-5.82) S4(-4.32,-5.82)
  silkscreen extent -4.32,-8.42 4.32,-2.92, body extent -4.32,-8.38 4.32,-0.13, height 3.21

## Part data
C1 C2 C3 C4 C5 C6 C7 C8 C9 C10 C11 C12 C13 C14 C15 C16 C17 C18 C19 C20 C21 C22 C23 C24 C25 C26 C27 C28 C29 C30 C31 C32 C33 C34 C35 C36 C37 C38 C39 C40 C41 C42: library part CMP-001-00018-4, "Chip Capacitor, 100 nF, +/- 10%, 50 V, 0805 (2012 Metric)", Capacitor Type=Ceramic, Case/Package=0805, Max Operating Temperature=125°C, Min Operating Temperature=-55°C, Tolerance=10%, Voltage Rating=50V, Mounting Technology=SM, Pins=2, RoHS Compliant=True
CN1: library part CMP-002-00071-1, "C167321 Jing Extension", ComponentLink1Description=Datasheet, ComponentLink1URL=https://datasheet.lcsc.com/szlcsc/1811101520_Jing-Extension-of-the-Electronic-Co-C167321_C167321.pdf
D1 D3: library part CMP-1055-00462-1, "Schottky Barrier Diode, 2-Pin SOD-323, Pb-Free, Tape and Reel", Manufacturer="On Semiconductor", ComponentLink1Description="Manufacturer URL", ComponentLink1URL=http://www.onsemi.com/, ComponentLink2Description=Datasheet, ComponentLink2URL=http://www.onsemi.cn/pub_link/Collateral/BAT54HT1-D.PDF, ComponentLink3Description="Package Specification", ComponentLink3URL=http://www.onsemi.com/pub_link/Collateral/477-02.PDF.1, Configuration=Single, DatasheetVersion="Rev. 6", IFSM Max (A)=0.6, Mounting Technology="Surface Mount", PackageDescription="2-Pin SOD, Body 1.7 x 1.25 mm", PackageReference=SOD-323-2-477-02, PackageVersion="Rev. H, 03/2007", Packing="Tape and Reel", PartNumber=BAT54HT1G, RoHS=TRUE, trr Max (ns)=5
D2: library part CMP-1055-00336-1, "Schottky Power Rectifier, 2-Pin SMB, Pb-Free, Tape and Reel", Manufacturer="On Semiconductor", ComponentLink1Description="Manufacturer URL", ComponentLink1URL=http://www.onsemi.com/, ComponentLink2Description=Datasheet, ComponentLink2URL=http://www.onsemi.cn/pub_link/Collateral/MBRS230LT3-D.PDF, ComponentLink3Description="Package Specification", ComponentLink3URL=http://www.onsemi.cn/pub_link/Collateral/MBRS230LT3-D.PDF, Configuration=Single, DatasheetVersion="Rev. 3", IFSM Max (A)=40, Mounting Technology="Surface Mount", PackageDescription="2-Pin Small Molded Package, J-Bend Lead, Body 4.315 x 3.555 mm", PackageReference=SMB-2-403A-03_D, PackageVersion="Rev. D", Packing="Tape and Reel", PartNumber=MBRS230LT3G, RoHS=TRUE
J1 J2: library part CMP-2000-05815-1, "PCB Terminal Block, 13.5 A, 400 V, 2-Pin THD, RoHS, Bulk", Current Rating=13500mA, Manufacturer="Phoenix Contact", Package Description="2-Pin Through Hole Device, Body 8.1 x 10.16 mm, Pitch 5.08 mm", Package Reference=1729128-2, Package Version=03/2015, Voltage Rating=400V, Datasheet URL=https://datasheet.ciiva.com/16046/1729128-16046181.pdf, Datasheet Version=12/2013, Manufacturer URL=http://www.phoenixcontact.com/, Mounting Technology=ThroughHole, No. of Positions=2, No. of Rows=1, Orientation=Horizontal, Package URL=https://www.phoenixcontact.com/online/portal/pi/pxc/product_detail_page/!ut/p/b1/3VdJjqNKFDxLH8AFycySyWY2ozFsEPOMMQaDOX1XedGL_1Vdm5YXJleknhSKeBkvI6EA8ncAo3AYoDhBQGco6KN7VURTdemj9us_IEKEZo_YHiPAEWEFmDGOHMORkqKYCORBZxgL7ZoaZYcbFFUZ3fqxSY6GOuxydWUuHqz1ynmMFygu583Bob0Ewr6Sd_l-5m-kAueHiB0jpRwZwe58wwtkpxtMYd_LmGcDRU02dRNEyWt6Y2ti5pSyJ_reIkzIulrqApdnbT11V5jnCKbYNCvhEM1MCpPByat_X379-iThf08CI5GfOPqfBeS3BRoBOdD55AKVv0iLwCMq-2BrzXWSGRH7pUGD9uwXQjiph3xL0DKQwdGa0JImiIOmBNOestqgwTHSSs2oOep-78apyXQBvNi8ZLaFjvjWvcaUEBu0MC6Wbe-d6mB0FAebo2lUWinqYaZs5DAYzV0RP9yitUjnGJ0iI9xhZkT42OCQNUJJhkgWINNQLP2JFP6OpMg3JCVg70jqHT0lvKOnhHf0lPuOnnLf0VPuWx6_dxwUIvwk5WMkT0kLL1mh61l2yZVSzG3pYV_bqo-mj6uMKwKwdnnW8Jh5RTOJzMOA5c-eJDaZQw4mTMPH02PvS_ZAqNVjVTo2WyYLkwH_KU1mmmG5kjRhDqPXLwwVHvVOjCM60-fpXvTDfMGW1PVFVS1r4e4yVDk4ZdNbkUHvqPqQSeian4UD39fNKmachqdJ1NJbyk8rXT9mXTvPk3oE5meulKGgiruPJek-4I9hTT6G8ZLOyRSm2RRVbThERQad5OS28hdt4YW4vG0stgYYzsWsK4_7y6DZMjJSCqri1kyiZR5vD7pwIrNR7QwPHTcLTI5qT7eRlpHrdGiupYlqQDJ7zy_CND8fWWBoLRXxk1RVcXiBQwbTD4Xi7KL-FuO94t9xaqweXzH, Packing=Bulk, PartNumber=1729128, Pitch=5.08mm, RoHS=TRUE
J3: library part CMP-1502-00946-1, "THT Vertical Pin Header WR-PHD, Pitch 1.27 mm, Dual Row, 4 pins", Contact Resistance=20mOhm, Manufacturer="Wurth Elektronik", Operating Temperature=-40to105degC, Rated Current=1A, Withstanding Voltage=500VAC, Working Voltage=100VAC, Datasheet URL=https://katalog.we-online.de/em/datasheet/62200421121.pdf, Gender=Male, Manufacturer URL=http://www.we-online.de, Mounting Technology=THT, Orientation=Vertical, Package Reference=62200421121, Packaging=Box, Part Number=62200421121, Pin Number=4, Pitch=1.27mm, Publisher=WurthElektronik, Row Number=Dual
L1: library part CMP-006-00021-2, "4.7uH 2A 58mOhm 5x5mm inductor Murata", Datasheet=https://datasheet.lcsc.com/szlcsc/1912111437_Murata-Electronics-LQH5BPN4R7NT0L_C171792.pdf
LED1 LED2 LED3 LED4 LED5: library part CMP-1426-00010-1, "SMD mono-color Chip LED, WL-SMCW, Super Red", Color="Super Red", Manufacturer="Wuerth Elektronik", PartNumber=150080SS75000, ComponentLink1Description="Manufacturer URL", ComponentLink1URL=http://www.we-online.com, ComponentLink2Description=Datasheet, ComponentLink2URL=http://katalog.we-online.com/led/datasheet/150080SS75000.pdf, PackageReference=0805_A
P1: library part CMP-1502-01060-1, "THT Vertical Pin Header WR-PHD, Pitch 2.54 mm, Single Row, 2 pins", Contact Resistance=20mOhm, Manufacturer="Wurth Elektronik", Operating Temperature=-40to105degC, Rated Current=3A, Withstanding Voltage=500VAC, Working Voltage=250VAC, Datasheet URL=https://katalog.we-online.de/em/datasheet/6130xx11121.pdf, Gender=Male, Manufacturer URL=http://www.we-online.de, Mounting Technology=THT, Orientation=Vertical, Package Reference=61300211121, Packaging=Bag, Part Number=61300211121, Pin Number=2, Pitch=2.54mm, Publisher=WurthElektronik, Row Number=Single
P2: library part CMP-1502-00949-1, "THT Vertical Pin Header WR-PHD, Pitch 1.27 mm, Dual Row, 14 pins", Contact Resistance=20mOhm, Manufacturer="Wurth Elektronik", Operating Temperature=-40to105degC, Rated Current=1A, Withstanding Voltage=500VAC, Working Voltage=100VAC, Datasheet URL=https://katalog.we-online.de/em/datasheet/62201421121.pdf, Gender=Male, Manufacturer URL=http://www.we-online.de, Mounting Technology=THT, Orientation=Vertical, Package Reference=62201421121, Packaging=Box, Part Number=62201421121, Pin Number=14, Pitch=1.27mm, Publisher=WurthElektronik, Row Number=Dual
Q1: library part CMP-2000-06249-1, "N-Channel Specified PowerTrench(R) MOSFET, 2.5 V, 1.7 A, -55 to 150 degC, 3-Pin SSOT3L, RoHS, Tape and Reel", Manufacturer=FairchildSemiconductor, Maximum Continuous Drain Current=1.7A, Maximum Drain Source Voltage=20V, Maximum Gate Source Voltage=±8V, Operating Temperature=-55to150°C, Package=3SuperSOT, Package Description="3-Pin Small Outline Transistor, Body 2.92 x 1.4 mm, Pitch 0.95 mm", Package Reference=SSOT3L, Package Version="Rev. 3, 05/2015", Category=MOSFET, Channel Mode=Enhancement, Channel Type=N, Datasheet URL=https://www.fairchildsemi.com/datasheets/FD/FDN335N.pdf, Datasheet Version="Rev. C, 04/1999", Manufacturer URL=https://www.fairchildsemi.com/, Mounting=SurfaceMount, Mounting Technology=SurfaceMount, Package URL=https://www.fairchildsemi.com/package-drawings/MA/MA03B.pdf, Packaging=Tape&Reel, Rad Hard=No, RDS-on=0.07@4.5VOhm, Typical Fall Time=3ns, Typical Rise Time=8.5ns, Typical Turn-Off Delay Time=11ns, Typical Turn-On Delay Time=5ns
R1 R2 R3 R4 R5 R6 R7 R8 R9 R10 R11 R12 R13 R14 R15 R16 R18 R19 R20 R21 R22 R23 R25 R26: library part CMP-009-00001-4, "Chip Resistor, 0 Ohm, +/- 1%, 125 mW, -55 to 155 degC, 0805 (2012 Metric)", Case/Package=0805, Max Operating Temperature=155°C, Min Operating Temperature=-55°C, Power=125mW, Tolerance=1%, Voltage Rating=150V, Mounting Technology=SM, Pins=2, RoHS Compliant=True
R17: library part CMP-009-00002-4, "Chip Resistor, 0 Ohm, +/- 5%, 0.25 W, -55 to 155 degC, 1206 (3216 Metric)", Case/Package=1206, Max Operating Temperature=155°C, Min Operating Temperature=-55°C, Power=250mW, Tolerance=5%, Voltage Rating=200V, Mounting Technology=SM, Pins=2, RoHS Compliant=True
R27 R28 R35 R37: library part CMP-009-00018-4, "Chip Resistor, 10 KOhm, +/- 1%, 125 mW, -55 to 155 degC, 0805 (2012 Metric)", Case/Package=0805, Max Operating Temperature=155°C, Min Operating Temperature=-55°C, Power=125mW, Tolerance=1%, Voltage Rating=150V, Mounting Technology=SM, Pins=2, RoHS Compliant=True
R29 R30 R31 R32 R33 R34: library part CMP-009-00122-2, "Chip Resistor, 470 Ohms, +/-5%, 125 mW, -55 to 155 degC, 0805", Case/Package=0805, Max Operating Temperature=155°C, Min Operating Temperature=-55°C, Power=125mW, Tolerance=5%, Pins=2
SW1 SW2 SW3 SW4: library part CMP-011-00013-1, "4 pin SMD switch"
U1: library part CMP-0243-00094-2, "ARM Cortex-M4 32-bit MCU+FPU, 105 DMIPS, 128 kB Flash, 64 kB Internal RAM, 48 I/Os, 64-pin LQFP, -40 to 85 degC, Tray", I/Os (High Current)=48, Manufacturer=STMicroelectronics, Operating Frequency(F) (Processor speed) (MHz)=84, Supply Voltage(Vcc) max (V)=3.6, Supply Voltage(Vcc) min (V)=1.8, ComponentLink1Description="Manufacturer URL", ComponentLink1URL=http://www.st.com/web/en/home.html, ComponentLink2Description=Datasheet, ComponentLink2URL=http://www.st.com/st-web-ui/static/active/en/resource/technical/document/data_brief/DM00071938.pdf, ComponentLink3Description="Package Specification", ComponentLink3URL=http://www.st.com/st-web-ui/static/active/en/resource/technical/document/datasheet/DM00037051.pdf, Core="ARM Cortex-M4", DatasheetVersion="Rev. 1", FLASH Size (Prog) (kB)=128, Internal RAM Size (kB)=64, Mounting Technology="Surface Mount", PackageDescription="64-Pin Low Profile Quad Flat Package, 10 x 10 mm Body, 0.5 mm Pitch", PackageReference=LQFP64, PackageVersion="Rev. 4, 06/2013", Packing=Tray, PartNumber=STM32F401RBT6
U2 U4 U7: library part CMP-0859-00266-3, "Single 2-Input Positive-AND Gate, DCK0005A, LARGE T&R", F @ Nom Voltage(Max)(Mhz)=150, Generic Part Number=SN74LVC1G08, ICC @ Nom Voltage(Max)(mA)=0.01, Manufacturer="Texas Instruments", Operating Temperature Range(C)="-40 to 125,-40 to 85", Rating=Catalog, tpd @ Nom Voltage(Max)(ns)=4.5,6,4,5, Voltage(Nom)(V)=1.8,2.5,3.3,5, 3-State Output=No, Bits(#)=1, DatasheetVersion=SCES217Y, Gate Type=AND, Input Type=CMOS/TTL, Logic=True, Output Drive (IOL/IOH)(Max)(mA)=32/-32, Output Type=CMOS, PackageReference=DCK0005A, Schmitt Trigger=No, Sub-Family="AND Gate", Technology Family=LVC, VCC(Max)(V)=5.5, VCC(Min)(V)=1.65
U3 U5 U6 U8: library part CMP-0859-00033-4, "Single Schmitt-Trigger Buffer, DBV0005A, LARGE T&R", F @ Nom Voltage(Max)(Mhz)=150, Generic Part Number=SN74LVC1G17, ICC @ Nom Voltage(Max)(mA)=0.01, Manufacturer="Texas Instruments", Operating Temperature Range(C)="-40 to 125,-40 to 85", Rating=Catalog, tpd @ Nom Voltage(Max)(ns)=11,6.5,5.5,5, Voltage(Nom)(V)=1.8,2.5,3.3,5, 3-State Output=No, Bits(#)=1, DatasheetVersion=SCES351V, Input Type=CMOS/TTL, Logic=True, Output Drive (IOL/IOH)(Max)(mA)=32/-32, Output Type=CMOS, PackageReference=DBV0005A, Schmitt Trigger=Yes, Sub-Family="Non-Inverting Buffer/Driver", Technology Family=LVC, VCC(Max)(V)=5.5, VCC(Min)(V)=1.65
U9: library part CMP-0323-00209-3, "Buck Step Down Regulator with 3.5 to 28 V Input and 0.8 to 25 V Output, -40 to 150 degC, 8-Pin SOIC (D), Green (RoHS & no Sb/Br)", Manufacturer="Texas Instruments", Rating=Catalog, Switch Current Limit(Typ)(A)=3.5, Code_JEDEC=MS-012AA, ComponentLink1Description=Datasheet, ComponentLink1URL=http://www.ti.com/general/docs/lit/getliterature.tsp?genericPartNumber=TPS54331&fileType=pdf, ComponentLink2Description="Package Specification", ComponentLink2URL=http://www.ti.com/litv/pdf/msoi002j, ComponentLink3Description="URL Link1", ComponentLink3URL="Samples URL:http://www.ti.com/product/tps54331#samples", DatasheetVersion=SLVS839D, Duty Cycle(Max)(%)=90, Eco-Plan="Green (RoHS & no Sb/Br)", Iout(Max)(A)=3, Iq(Typ)(mA)=0.11, Mounting Technology="Surface Mount", PackageDescription="8-Pin Plastic Small Outline Integrated Circuit, 4.9 x 3.9 mm, Pitch 1.27 mm Pitch", PackageReference=D0008A, PackageVersion="revM, Jun-2011", PartNumber=TPS54331DR, Regulated Outputs(#)=1, SubFamily="Step-Down Regulator", Topology=Buck, Vin(Max)(V)=28, Vin(Min)(V)=3.5, Vout(Max)(V)=25, Vout(Min)(V)=0.8
U10: library part CMP-06324-000014-1, "IC REG LINEAR 3.3V 150MA SOT23-5", Dropout Voltage=165mV, Manufacturer=Microchip, Max Junction Temp=+125°C, Max Supply Voltage=16V, Min Supply Voltage=2.5V, Output Current=150mA, Package=M5, Temperature="-40°C to +125°C", Temperature Range Low=-40°C, Accuracy Percentage=2%, Automotive=No, ComponentLink2Description=Datasheet, ComponentLink2URL=http://ww1.microchip.com/downloads/en/DeviceDoc/20005785A.pdf, Device Class L1="Integrated Circuits (ICs)", Device Class L2="Power Management ICs", Device Class L3="Voltage Regulators - Linear", Digikey Description="IC REG LINEAR 3.3V 150MA SOT23-5", Height=1.45mm, Ipc Land Pattern Name=SOT95P280X118-5, Lead Free=Yes, Manufacturer Part Number=MIC5205-3.3YM5-TR, Mouser Description="LDO Voltage Regulators", Number Of Outputs=1, Octopart=https://octopart.com/mic5205-3.3ym5-tr-microchip-66802130, Output Type=Fixed, RoHS=TRUE, Standoff Height=0mm, Temperature Range High=+125°C
U11: library part CMP-0188-00771-2, "7-Bit Single I2C Digital POT with Volatile Memory, 6-pin SC70, Extended Temperature, Tape and Reel", ComponentLink1Description="Manufacturer URL", ComponentLink1URL=http://www.microchip.com/, ComponentLink2Description=Datasheet, ComponentLink2URL=http://ww1.microchip.com/downloads/en/DeviceDoc/22147a.pdf, ComponentLink3Description="Package Specification", ComponentLink3URL=http://www.microchip.com/stellent/groups/techpub_sg/documents/packagingspec/en012702.pdf, DatasheetVersion="revA, Mar-2009", PackageDescription="6-Lead Plastic Small Outline Transistor (LT) [SC70]", PackageReference=SC70-LT6, PackageVersion="revBB, Aug-2009", RevisionNote="URLs added."
U12 U13: library part CMP-0272-00883-3, "Single LinCMOS(TM) Rail-to-Rail uPower Operational Amplifier, 2.7 to 10 V, 0 to 70 degC, 5-pin SOT23 (DBV5), Green (RoHS & no Sb/Br)", Manufacturer="Texas Instruments", Total Supply Voltage(Max)(+5V is 5, +/-5V is 10)=10, Total Supply Voltage(Min)(+5V is 5, +/-5V is 10)=2.7, CMRR(Min)(dB)=65, Code_JEDEC=MO-178, ComponentLink1Description="Manufacturer URL", ComponentLink1URL=http://www.ti.com/, ComponentLink2Description=Datasheet, ComponentLink2URL=http://www.ti.com/general/docs/lit/getliterature.tsp?genericPartNumber=TLV2711&fileType=pdf, ComponentLink3Description="Package Specification", ComponentLink3URL=http://www.ti.com/litv/pdf/mpds018i, DatasheetVersion=SLOS196A, Eco-Plan="Green (RoHS & no Sb/Br)", IIB(Max)(pA)=60, Iq per channel(Max)(mA)=0.025, Mounting Technology="Surface Mount", Number of Channels=1, Offset Drift(Typ)(uV/C)=1, PackageDescription="5-Pin Plastic Small Outline, Body 1.6 x 2.9 mm, Pitch 0.95 mm", PackageReference=DBV0005A, PackageVersion="4073253-4/K, 03/2006", PartNumber=TLV2711CDBVR, Slew Rate(Typ)(V/us)=0.025, Sub Family="Low Power Amp (<=500uA), Low Supply Voltage Amplifier (<=2.7V), Precision Amplifier", Vio (25C)(Max)(mV)=3, Vn at 1kHz(Typ)(nV/rtHz)=22
U14: library part CMP-001-0003-2, "C91755"
U15: library part CMP-015-00008-1, "USB to UART Converter", Datasheet=https://www.mpja.com/download/35227cpdata.pdf
U16: library part CMP-014-00002-1, "Current Sense Amplifier 100V/V", ComponentLink1Description=Datasheet, ComponentLink1URL=https://datasheet.lcsc.com/szlcsc/1811151640_Texas-Instruments-INA180A3IDBVR_C122882.pdf
U17: library part CMP-1058-00754-2, "MOSFET P-CH 20V 1.8A SOT-23", Case/Package=SOT-23-3, Continuous Drain Current (ID)=-3.2A, Drain to Source Breakdown Voltage=-20V, Drain to Source Resistance=112mR, Drain to Source Voltage (Vdss)=20V, Gate to Source Voltage (Vgs)=8V, Input Capacitance=675pF, Max Operating Temperature=150°C, Max Power Dissipation=730mW, Min Operating Temperature=-55°C, On-State Resistance=70MR, Package Quantity=1, Threshold Voltage=-720mV, Contact Plating=Tin, Current Rating=-3.2A, Element Configuration=Single, Fall Time=12.6ns, Height=0.94mm, Lead Free="Lead Free", Length=2.9mm, Nominal Vgs=-720mV, Number of Elements=1, Number of Pins=3, Packaging="Tape and Reel", Power Dissipation=730mW, Radiation Hardening=No, Rds On Max=85mR, REACH SVHC="No SVHC", Rise Time=12.6ns, Turn-Off Delay Time=30.2ns, Turn-On Delay Time=7.5ns, Voltage Rating (DC)=-20V, Width=1.3mm
X1: library part CMP-003-00030-1, "3225 crystal"

## Free pads (board coordinates)
  round 3 hole 2.2: 2(2.5,2.5) 2(2.5,47.5) 2(97.5,2.5) 2(97.5,47.5)

## Via types
v1: diameter 0.45, hole 0.3, Top Layer to Bottom Layer, 169 vias
v2: diameter 1.27, hole 0.711, Top Layer to Bottom Layer, 82 vias

## Nets (pads, with @x,y where several pads share a name; then routed paths per layer and width w, separated by ;. In a path a pad name is that pad's centre, name@x,y a point inside that pad or via, vN(x,y) a via of type N, cw(c..) or ccw(c..) an arc to the next point about the centre after c; other vN are vias at no path point)
+3v3: C5.2 C6.2 C7.2 C8.2 C9.2 C10.2 C13.1 C14.1 C15.1 C16.1 C17.1 C18.1 C19.1 C20.1 C21.2 C24.1 C25.1 C28.1 C39.2 C40.1 P1.1 R5.1 R6.1 R8.2 R9.2 R10.2 R11.2 R12.2 R13.2 U1.19 U1.32 U1.48 U1.64 U2.5 U3.1 U4.5 U5.1 U6.1 U7.5 U8.1 U10.5 U11.1 U14.6 U14.7 U14.9 U14.11 U14.15 U15.7 U15.10 U16.5 | length 98.7
  Top Layer w0.381: U16.5@22.55,3.55 22.56,3.54 U16.5@22.725,3.54 ; C28.1@22.825,1.5 22.825,3.441 U16.5@22.725,3.54 ; v1(23.419,3.531) 23.409,3.54 U16.5@22.725,3.54 ; C40.1@37.175,18.75 37.196,18.771 v1(38.303,18.771) ; v1(40.183,17.678) 40.183,17.66 40.391,17.452 40.391,16.959 U11.1@40.4,16.95 ; R11.2@53.1,35.225 53.111,35.236 v1(53.111,36.322) ; U8.1@53.6,33.5 53.6,33.375 53.685,33.29 53.81,33.29 53.95,33.15 C16.1@55.65,33.15 55.653,33.147 v1(56.794,33.147) ; v1(56.617,35.154) 57.654,35.154 C15.1@57.725,35.225 ; U7.5@59.3,31 59.305,30.995 59.305,30.154 v1(59.309,30.15) ; R6.1@60.75,17.8 60.757,17.793 v1(60.757,16.764) ; R5.1@61.223,27.051 61.248,27.026 v1(62.112,27.026) ; U1.64@66.75,24.3 66.75,24.247 66.764,24.261 v1(66.764,25.59) ; U1.19@67.75,13.2 67.75,11.075 67.827,10.998 v1(68.707,10.998) ; v1(69.825,26.924) 70.749,26.924 C7.2@70.825,27 ; v1(71.171,8.407) C39.2@72.263,8.407 ; C39.2@72.25,8.425 72.25,8.42 C39.2@72.263,8.407 ; C39.2@72.288,8.382 C39.2@72.263,8.407 ; U1.32@74.25,13.2 74.25,12.531 74.825,11.956 C5.2@74.825,11 74.879,10.946 v1(74.879,9.982) ; U1.48@76.05,22.5 77.425,22.5 77.69,22.234 77.69,22.209 78.225,21.675 C8.2@78.25,21.675 78.284,21.641 v1(79.172,21.641) ; C9.2@78.25,15.825 v1(79.197,15.824) ; U15.7@85.29,21.26 84.399,21.26 84.176,21.037 84.176,19.973 84.399,19.75 U15.10@85.3,19.75 85.744,19.75 86.041,19.454 86.041,18.534 C25.1@86.575,18 86.558,17.983 v1(85.471,17.983) ; U15.7@85.31,21.26 86.352,21.26 86.575,21.483 C24.1@86.575,23.5 86.555,23.52 v1(85.471,23.52)
  Top Layer w0.508: v1(61.265,35.204) 62.079,35.204 R10.2@62.1,35.225 ; U6.1@62.6,33.5 62.6,33.375 62.825,33.15 C17.1@64.65,33.15 64.672,33.172 v1(65.786,33.172) ; v1(65.634,35.23) 66.72,35.23 C14.1@66.725,35.225 66.971,34.979 66.971,33.479 U4.5@67,33.45 ; v1(70.256,35.204) 71.079,35.204 R9.2@71.1,35.225 ; U5.1@71.6,33.5 71.6,33.375 71.825,33.15 C18.1@73.65,33.15 73.672,33.172 v1(74.778,33.172) ; C39.2@72.25,8.425 73.551,8.425 73.863,8.738 74.29,8.738 74.3,8.748 U10.5@74.3,8.825 ; v1(75.743,36.322) 75.743,35.243 C13.1@75.725,35.225 75.971,34.979 75.971,33.479 U2.5@76,33.45 ; C10.2@76.425,27 76.454,26.971 v1(76.454,25.857) ; v1(79.299,35.23) 80.095,35.23 R8.2@80.1,35.225 ; U3.1@80.6,33.5 80.6,33.375 80.621,33.354 82.446,33.354 C19.1@82.65,33.15 82.653,33.147 v1(83.718,33.147)
  Bottom Layer w0.381: 12.722,34.141 15.495,31.368 U14.15@15.495,29.476 ; v1(66.764,25.59) 68.097,26.924 v1(69.825,26.924)
  Bottom Layer w0.508: U14.6@9.195,29.476 9.195,33.147 9.895,33.847 ; U14.7@9.895,29.476 9.895,33.847 ; U14.9@11.295,29.476 11.295,35.03 11.246,35.079 11.246,35.104 C20.1@10.775,35.575 ; U14.11@12.695,29.476 12.722,29.503 12.722,34.141 C21.2@12.722,35.548 ; C21.2@12.75,35.575 v1(11.762,35.575) C20.1@10.775,35.575 ; R13.2@17.75,37.55 17.755,37.545 v1(17.755,36.525) ; R12.2@19.75,37.55 19.761,37.539 v1(19.761,36.525) ; 9.895,33.847 10.389,34.341 10.389,35.189 C20.1@10.775,35.575
  Bottom Layer w0.762: C21.2@12.722,35.548 C21.2@12.75,35.575